# EAGLE board Qwiic_USB_Bridge_ATSAMD21G-Panel (EAGLE 9.6.2), part 1 of 2
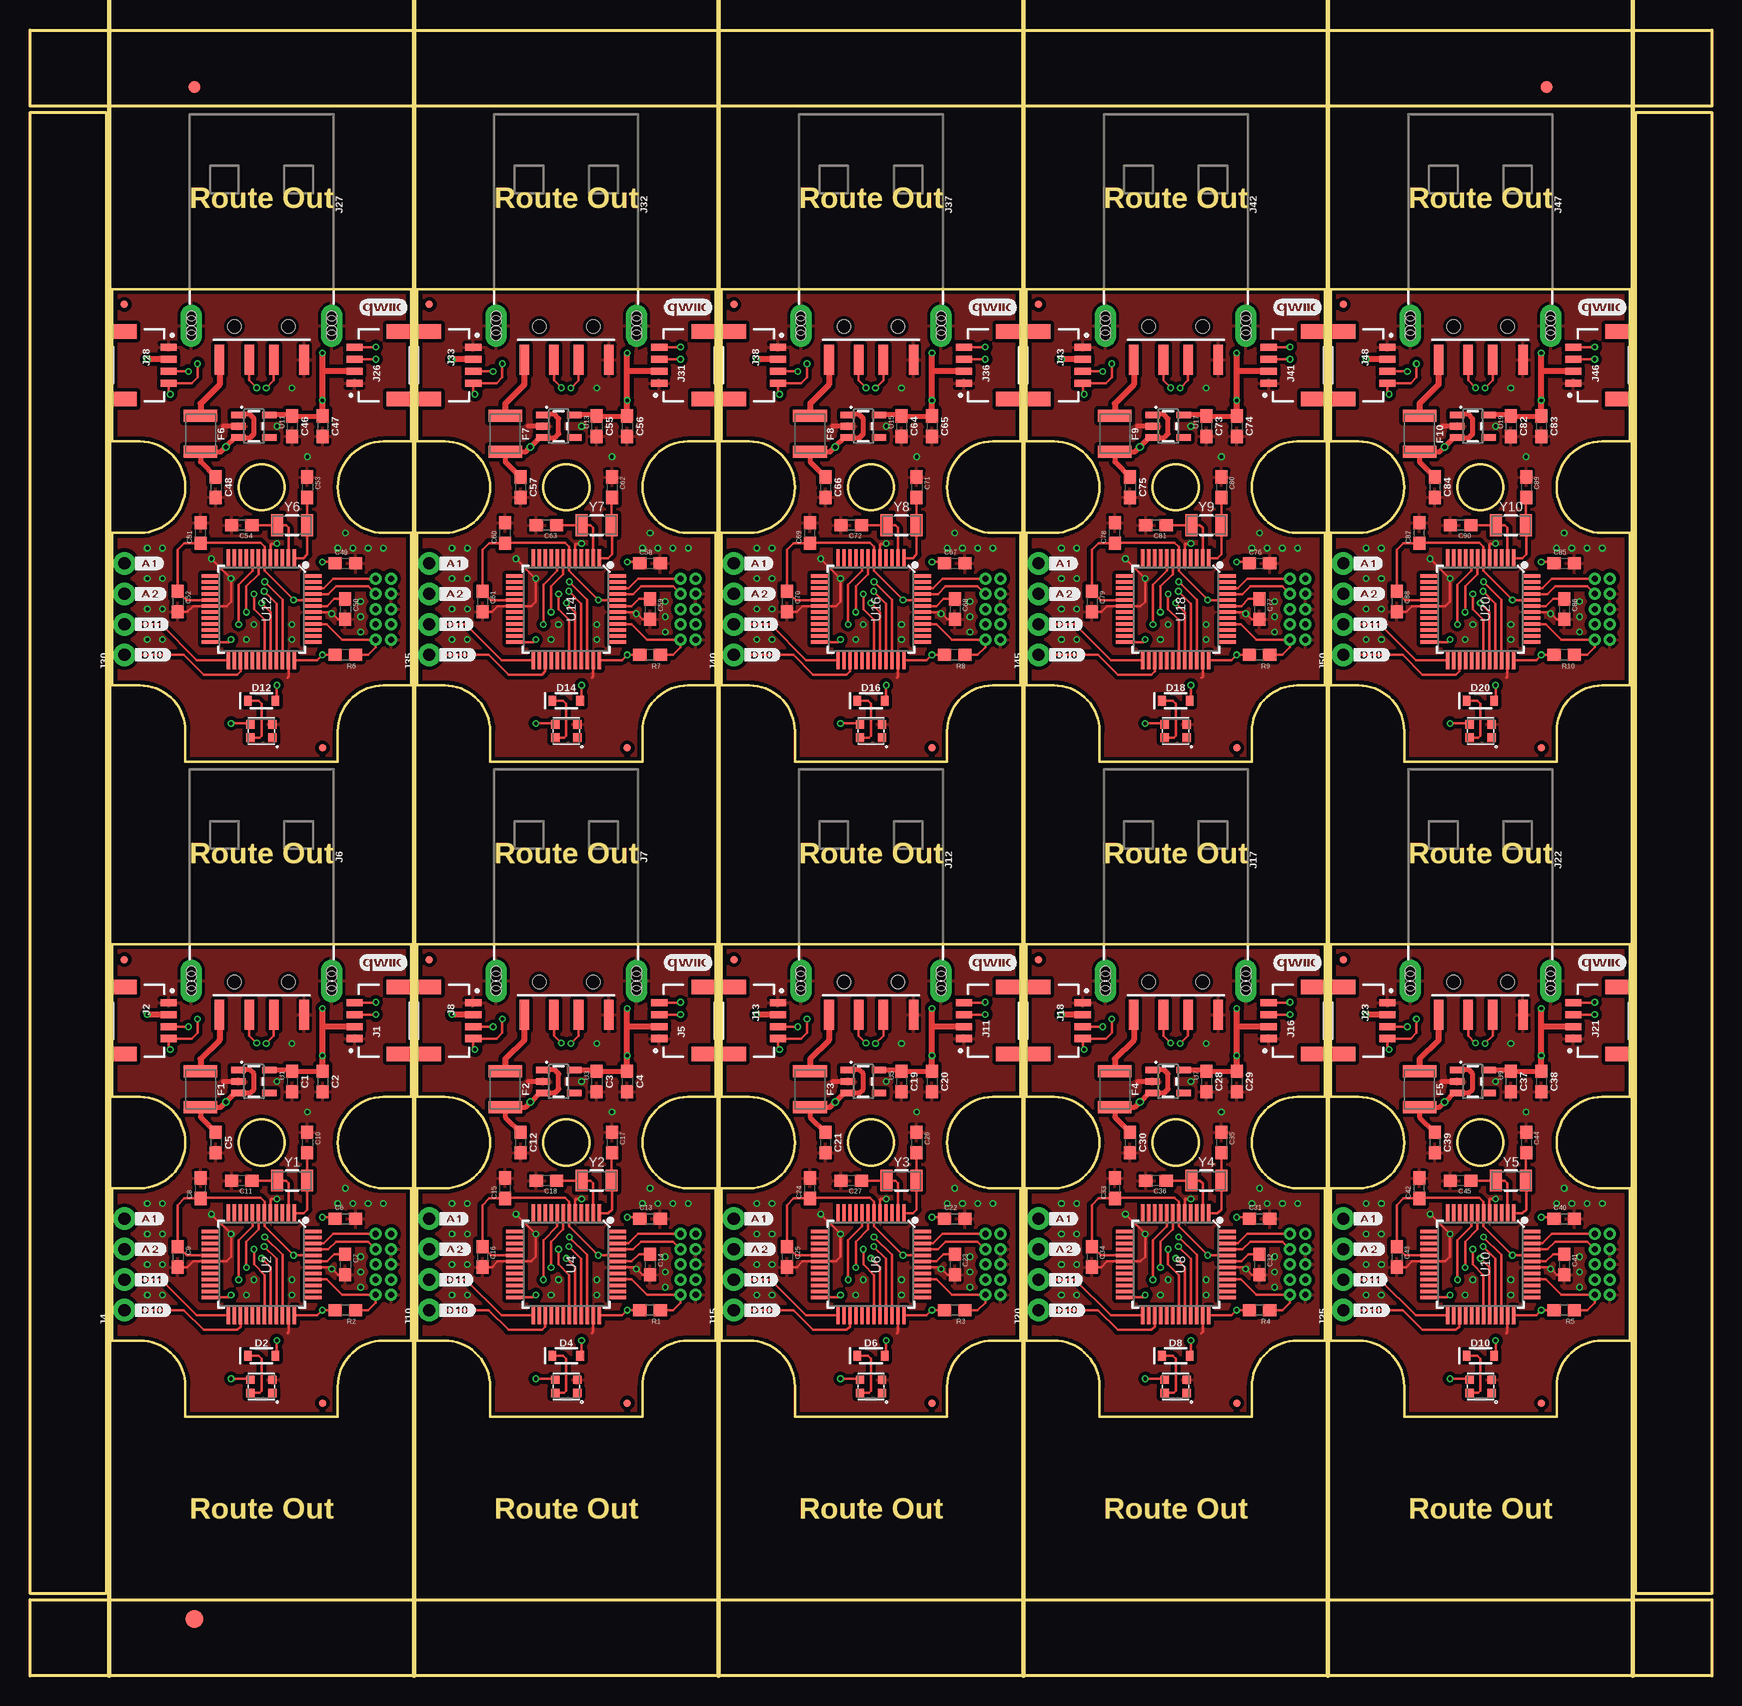
[diagram p0: board, top side]
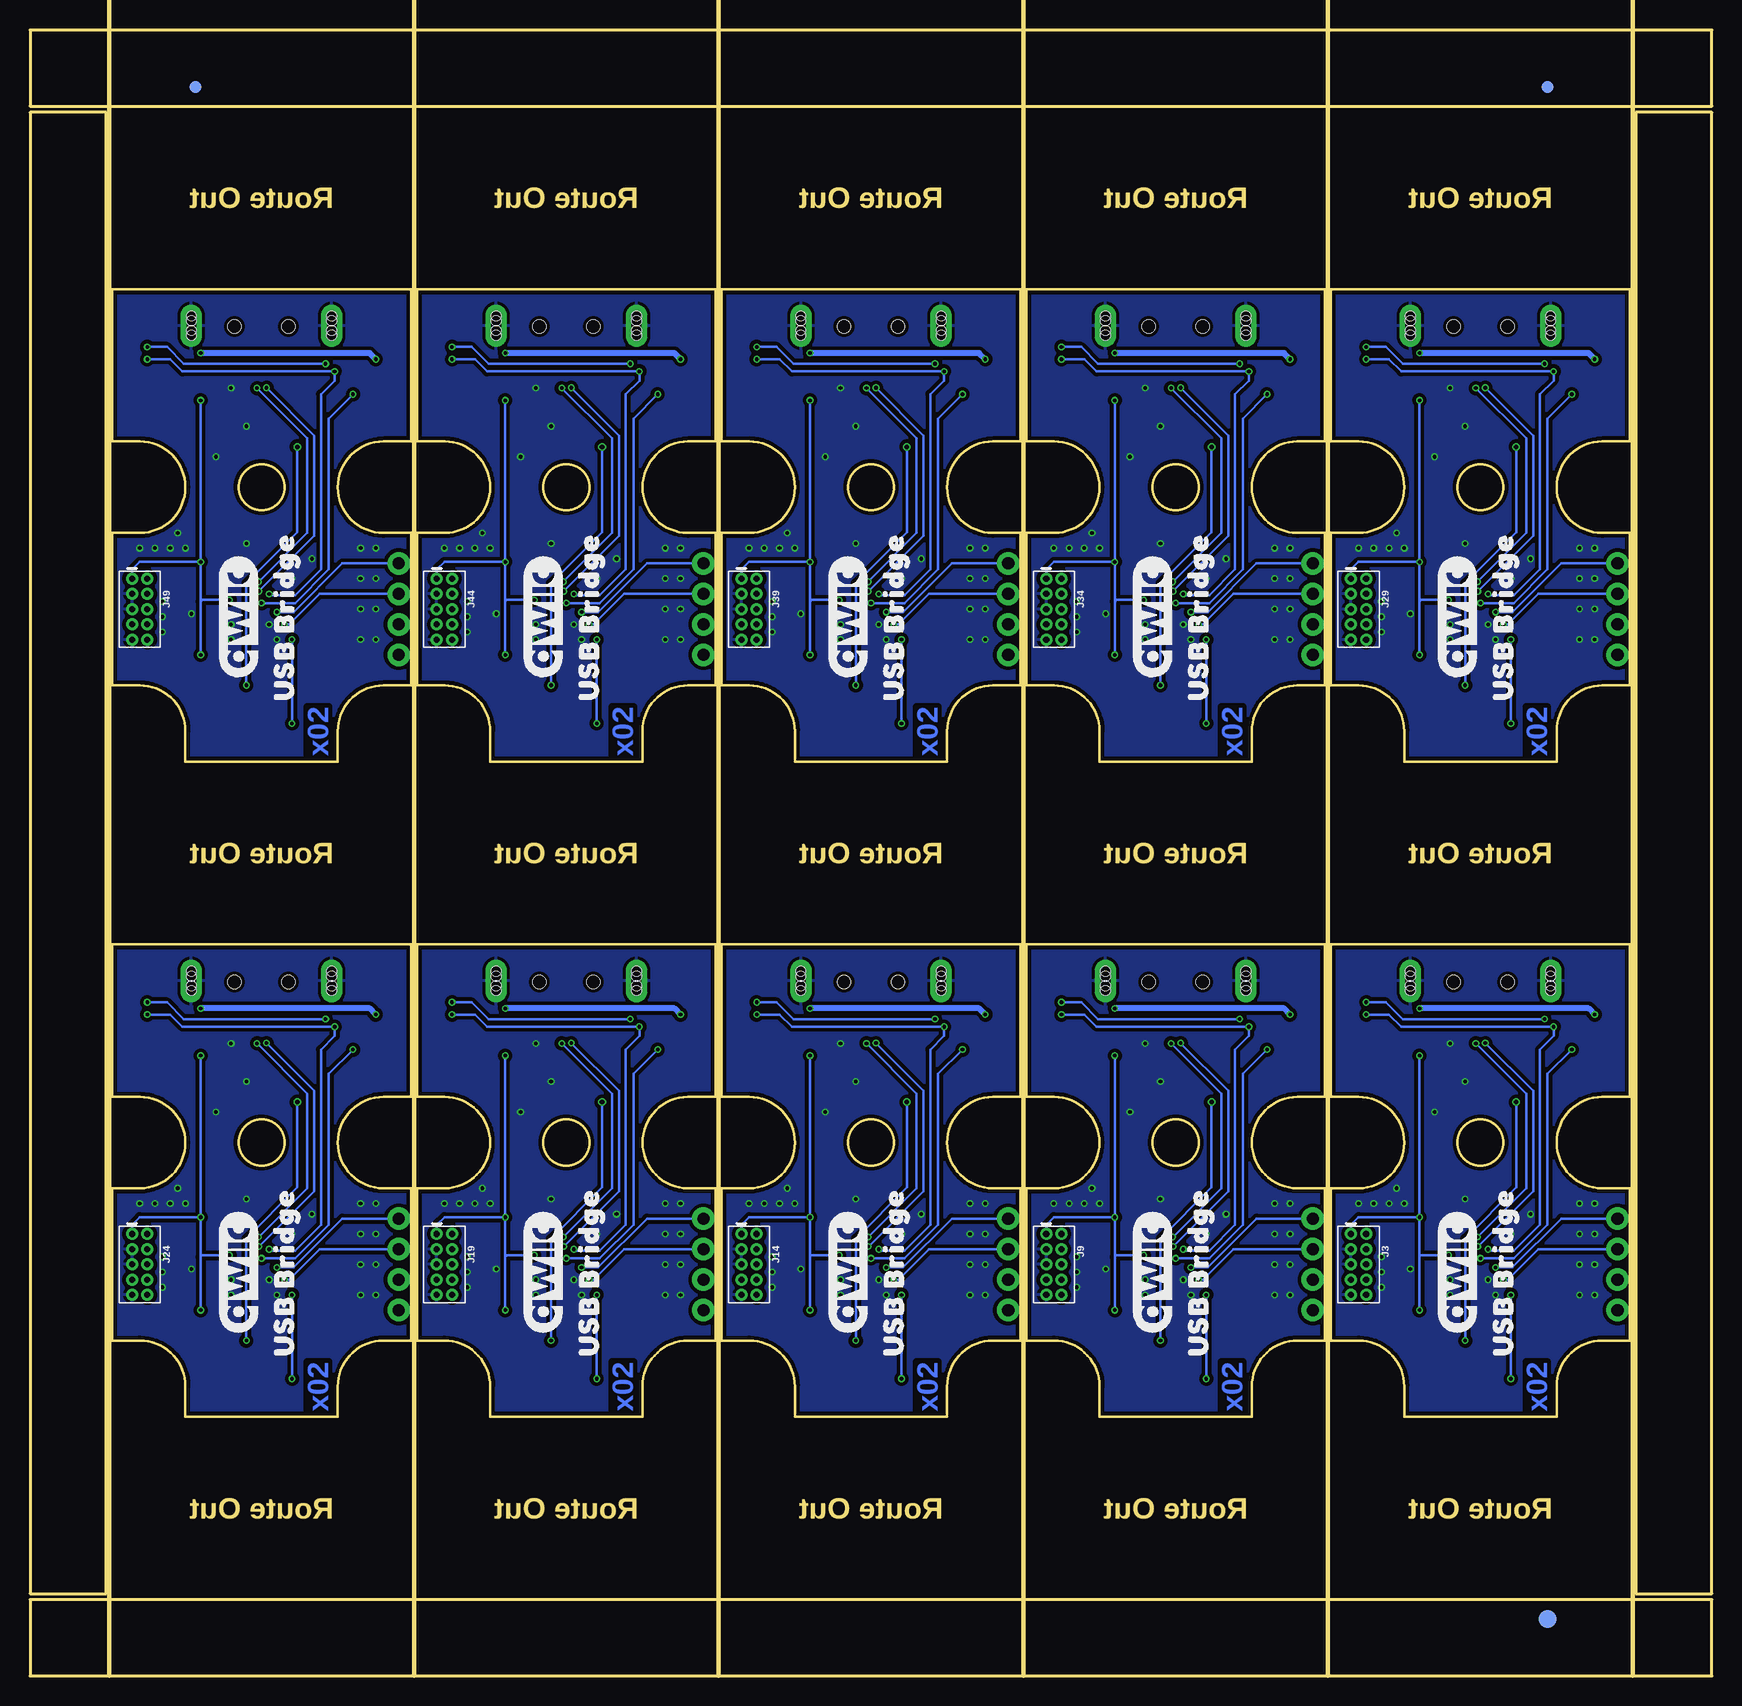
[diagram p1: board, bottom side, seen from below]

Size 140.21 x 137.16 mm. Coordinates in mm from the lower left corner, seen from the top.
Outline: 12.95,21.59 25.65,21.59 25.65,24.13 arc-90 29.46,27.94 31.75,27.94 31.75,40.64 29.46,40.64 arc-180 29.46,48.26 31.75,48.26 31.75,60.96 6.86,60.96 6.86,48.26 9.14,48.26 arc-180 9.14,40.64 6.86,40.64 6.86,27.94 9.14,27.94 arc-90 12.95,24.13 12.95,21.59
Outline: 38.35,21.59 51.05,21.59 51.05,24.13 arc-90 54.86,27.94 57.15,27.94 57.15,40.64 54.86,40.64 arc-180 54.86,48.26 57.15,48.26 57.15,60.96 32.26,60.96 32.26,48.26 34.54,48.26 arc-180 34.54,40.64 32.26,40.64 32.26,27.94 34.54,27.94 arc-90 38.35,24.13 38.35,21.59
Outline: 63.75,21.59 76.45,21.59 76.45,24.13 arc-90 80.26,27.94 82.55,27.94 82.55,40.64 80.26,40.64 arc-180 80.26,48.26 82.55,48.26 82.55,60.96 57.66,60.96 57.66,48.26 59.94,48.26 arc-180 59.94,40.64 57.66,40.64 57.66,27.94 59.94,27.94 arc-90 63.75,24.13 63.75,21.59
Outline: 89.15,21.59 101.85,21.59 101.85,24.13 arc-90 105.66,27.94 107.95,27.94 107.95,40.64 105.66,40.64 arc-180 105.66,48.26 107.95,48.26 107.95,60.96 83.06,60.96 83.06,48.26 85.34,48.26 arc-180 85.34,40.64 83.06,40.64 83.06,27.94 85.34,27.94 arc-90 89.15,24.13 89.15,21.59
Outline: 114.55,21.59 127.25,21.59 127.25,24.13 arc-90 131.06,27.94 133.35,27.94 133.35,40.64 131.06,40.64 arc-180 131.06,48.26 133.35,48.26 133.35,60.96 108.46,60.96 108.46,48.26 110.74,48.26 arc-180 110.74,40.64 108.46,40.64 108.46,27.94 110.74,27.94 arc-90 114.55,24.13 114.55,21.59
Outline: 12.95,76.2 25.65,76.2 25.65,78.74 arc-90 29.46,82.55 31.75,82.55 31.75,95.25 29.46,95.25 arc-180 29.46,102.87 31.75,102.87 31.75,115.57 6.86,115.57 6.86,102.87 9.14,102.87 arc-180 9.14,95.25 6.86,95.25 6.86,82.55 9.14,82.55 arc-90 12.95,78.74 12.95,76.2
Outline: 38.35,76.2 51.05,76.2 51.05,78.74 arc-90 54.86,82.55 57.15,82.55 57.15,95.25 54.86,95.25 arc-180 54.86,102.87 57.15,102.87 57.15,115.57 32.26,115.57 32.26,102.87 34.54,102.87 arc-180 34.54,95.25 32.26,95.25 32.26,82.55 34.54,82.55 arc-90 38.35,78.74 38.35,76.2
Outline: 63.75,76.2 76.45,76.2 76.45,78.74 arc-90 80.26,82.55 82.55,82.55 82.55,95.25 80.26,95.25 arc-180 80.26,102.87 82.55,102.87 82.55,115.57 57.66,115.57 57.66,102.87 59.94,102.87 arc-180 59.94,95.25 57.66,95.25 57.66,82.55 59.94,82.55 arc-90 63.75,78.74 63.75,76.2
Outline: 89.15,76.2 101.85,76.2 101.85,78.74 arc-90 105.66,82.55 107.95,82.55 107.95,95.25 105.66,95.25 arc-180 105.66,102.87 107.95,102.87 107.95,115.57 83.06,115.57 83.06,102.87 85.34,102.87 arc-180 85.34,95.25 83.06,95.25 83.06,82.55 85.34,82.55 arc-90 89.15,78.74 89.15,76.2
Outline: 114.55,76.2 127.25,76.2 127.25,78.74 arc-90 131.06,82.55 133.35,82.55 133.35,95.25 131.06,95.25 arc-180 131.06,102.87 133.35,102.87 133.35,115.57 108.46,115.57 108.46,102.87 110.74,102.87 arc-180 110.74,95.25 108.46,95.25 108.46,82.55 110.74,82.55 arc-90 114.55,78.74 114.55,76.2
Outline: 0,6.35 140.21,6.35 140.21,0 0,0 0,6.35
Outline: 133.86,130.3 140.21,130.3 140.21,6.86 133.86,6.86 133.86,130.3
Outline: 0,137.16 140.21,137.16 140.21,130.81 0,130.81 0,137.16
Outline: 0,130.3 6.35,130.3 6.35,6.86 0,6.86 0,130.3
Outline: circle at 19.3,44.45 radius 1.91
Outline: circle at 44.7,44.45 radius 1.91
Outline: circle at 70.1,44.45 radius 1.91
Outline: circle at 95.5,44.45 radius 1.91
Outline: circle at 120.9,44.45 radius 1.91
Outline: circle at 19.3,99.06 radius 1.91
Outline: circle at 44.7,99.06 radius 1.91
Outline: circle at 70.1,99.06 radius 1.91
Outline: circle at 95.5,99.06 radius 1.91
Outline: circle at 120.9,99.06 radius 1.91
Copper layers (1*16): Top 0.035mm / dielectric 1.5mm / Bottom 0.035mm
Design rules "Qwiic_USB_Bridge_ATSAMD21G": minimum track width 5mil, minimum drill 0.3mm, track to track 5mil, track to pad 5mil, pad to pad 5mil, via to via 5mil, smd to smd 5mil, copper to edge 7mil, drill to drill 7mil, minimum pad ring 5mil, minimum via ring 5mil, stop-mask expansion 4mil, vias tented up to drill 25mil, thermal gap 10mil
Milling: 6 lines

## Footprints (pad centres in the part's own frame; a part is rotated, then mirrored left to right if it is on the bottom)
0603 = smd 1.1 x 1: 1 -0.85,0; 2 0.85,0
WS2812-2020 = smd 0.7 x 0.7: DI -0.915,0.55; DO 0.915,-0.55; GND 0.915,0.55; VCC -0.915,-0.55
SOD-323 = smd 0.63 x 0.83: A 1.15,0; C -1.15,0
FIDUCIAL-1X2 = smd 1 x 1: 1 0,0
FIDUCIAL-1.5X3 = smd 1.5 x 1.5: 1 0,0
1210 = smd 1 x 2.8: 1 -1.5,0; 2 1.5,0
FIDUCIAL-MICRO = smd 0.635 x 0.635: 1 0,0
JST04_1MM_RA = smd 0.6 x 1.35: 1 -1.5,0; 2 -0.5,0; 3 0.5,0; 4 1.5,0 | smd 1.2 x 2: NC1 2.8,-3.675; NC2 -2.8,-3.675
2X5-PTH-1.27MM = drill 0.508 pad 1: 1 -2.54,-0.635; 2 -2.54,0.635; 3 -1.27,-0.635; 4 -1.27,0.635; 5 0,-0.635; 6 0,0.635; 7 1.27,-0.635; 8 1.27,0.635; 9 2.54,-0.635; 10 2.54,0.635
1X04_NO_SILK = drill 1.016 pad 1.88: 1 0,0; 2 2.54,0; 3 5.08,0; 4 7.62,0
USB-A-SMT-MALE = smd 2.5 x 0.8: D+1 10.95,1.027; D-1 10.95,-1.027; GND1 10.95,3.551; VBUS1 10.95,-3.5 | drill 0.8 pad 1.778 long: SHLD1 8.13,-5.85; SHLD2 8.13,5.85 | hole 1.1: 8.2,2.25; 8.2,-2.25 | hole 0.8: 8.53,-5.85; 8.93,-5.85; 7.73,-5.85; 7.33,-5.85; 8.53,5.85; 8.93,5.85; 7.73,5.85; 7.33,5.85
SOT23-5 = smd 0.55 x 1.2: 1 -0.95,-1.3; 2 0,-1.3; 3 0.95,-1.3; 4 0.95,1.3; 5 -0.95,1.3
TQFP-48 = smd 1.5 x 0.28: 1 -4.25,2.75; 2 -4.25,2.25; 3 -4.25,1.75; 4 -4.25,1.25; 5 -4.25,0.75; 6 -4.25,0.25; 7 -4.25,-0.25; 8 -4.25,-0.75; 9 -4.25,-1.25; 10 -4.25,-1.75; 11 -4.25,-2.25; 12 -4.25,-2.75; 25 4.25,-2.75; 26 4.25,-2.25; 27 4.25,-1.75; 28 4.25,-1.25; 29 4.25,-0.75; 30 4.25,-0.25; 31 4.25,0.25; 32 4.25,0.75; 33 4.25,1.25; 34 4.25,1.75; 35 4.25,2.25; 36 4.25,2.75 | smd 0.28 x 1.5: 13 -2.75,-4.25; 14 -2.25,-4.25; 15 -1.75,-4.25; 16 -1.25,-4.25; 17 -0.75,-4.25; 18 -0.25,-4.25; 19 0.25,-4.25; 20 0.75,-4.25; 21 1.25,-4.25; 22 1.75,-4.25; 23 2.25,-4.25; 24 2.75,-4.25; 37 2.75,4.25; 38 2.25,4.25; 39 1.75,4.25; 40 1.25,4.25; 41 0.75,4.25; 42 0.25,4.25; 43 -0.25,4.25; 44 -0.75,4.25; 45 -1.25,4.25; 46 -1.75,4.25; 47 -2.25,4.25; 48 -2.75,4.25
CRYSTAL-SMD-3.2X1.5MM = smd 1 x 1.8: P$1 -1.25,0; P$2 1.25,0

## Placement (x,y rotation side)
C1  10uF  [0603]  21.84,49.53 270 top
C2  1.0uF  [0603]  24.38,49.53 270 top
C3  10uF  [0603]  47.24,49.53 270 top
C4  1.0uF  [0603]  49.78,49.53 270 top
C5  0.1uF  [0603]  15.49,44.45 270 top
C6  0.1uF  [0603]  26.29,38.1 0 top
C7  0.1uF  [0603]  26.29,34.29 270 top
C8  0.1uF  [0603]  14.22,40.64 90 top
C9  0.1uF  [0603]  12.32,34.92 270 top
C10  15pF  [0603]  23.11,44.45 270 top
C11  15pF  [0603]  17.65,41.27 180 top
C12  0.1uF  [0603]  40.89,44.45 270 top
C13  0.1uF  [0603]  51.69,38.1 0 top
C14  0.1uF  [0603]  51.69,34.29 270 top
C15  0.1uF  [0603]  39.62,40.64 90 top
C16  0.1uF  [0603]  37.72,34.92 270 top
C17  15pF  [0603]  48.51,44.45 270 top
C18  15pF  [0603]  43.05,41.27 180 top
C19  10uF  [0603]  72.64,49.53 270 top
C20  1.0uF  [0603]  75.18,49.53 270 top
C21  0.1uF  [0603]  66.29,44.45 270 top
C22  0.1uF  [0603]  77.09,38.1 0 top
C23  0.1uF  [0603]  77.09,34.29 270 top
C24  0.1uF  [0603]  65.02,40.64 90 top
C25  0.1uF  [0603]  63.12,34.92 270 top
C26  15pF  [0603]  73.91,44.45 270 top
C27  15pF  [0603]  68.45,41.27 180 top
C28  10uF  [0603]  98.04,49.53 270 top
C29  1.0uF  [0603]  100.58,49.53 270 top
C30  0.1uF  [0603]  91.69,44.45 270 top
C31  0.1uF  [0603]  102.49,38.1 0 top
C32  0.1uF  [0603]  102.49,34.29 270 top
C33  0.1uF  [0603]  90.42,40.64 90 top
C34  0.1uF  [0603]  88.52,34.92 270 top
C35  15pF  [0603]  99.31,44.45 270 top
C36  15pF  [0603]  93.85,41.27 180 top
C37  10uF  [0603]  123.44,49.53 270 top
C38  1.0uF  [0603]  125.98,49.53 270 top
C39  0.1uF  [0603]  117.09,44.45 270 top
C40  0.1uF  [0603]  127.89,38.1 0 top
C41  0.1uF  [0603]  127.89,34.29 270 top
C42  0.1uF  [0603]  115.82,40.64 90 top
C43  0.1uF  [0603]  113.92,34.92 270 top
C44  15pF  [0603]  124.71,44.45 270 top
C45  15pF  [0603]  119.25,41.27 180 top
C46  10uF  [0603]  21.84,104.14 270 top
C47  1.0uF  [0603]  24.38,104.14 270 top
C48  0.1uF  [0603]  15.49,99.06 270 top
C49  0.1uF  [0603]  26.29,92.71 0 top
C50  0.1uF  [0603]  26.29,88.9 270 top
C51  0.1uF  [0603]  14.22,95.25 90 top
C52  0.1uF  [0603]  12.32,89.53 270 top
C53  15pF  [0603]  23.11,99.06 270 top
C54  15pF  [0603]  17.65,95.89 180 top
C55  10uF  [0603]  47.24,104.14 270 top
C56  1.0uF  [0603]  49.78,104.14 270 top
C57  0.1uF  [0603]  40.89,99.06 270 top
C58  0.1uF  [0603]  51.69,92.71 0 top
C59  0.1uF  [0603]  51.69,88.9 270 top
C60  0.1uF  [0603]  39.62,95.25 90 top
C61  0.1uF  [0603]  37.72,89.53 270 top
C62  15pF  [0603]  48.51,99.06 270 top
C63  15pF  [0603]  43.05,95.89 180 top
C64  10uF  [0603]  72.64,104.14 270 top
C65  1.0uF  [0603]  75.18,104.14 270 top
C66  0.1uF  [0603]  66.29,99.06 270 top
C67  0.1uF  [0603]  77.09,92.71 0 top
C68  0.1uF  [0603]  77.09,88.9 270 top
C69  0.1uF  [0603]  65.02,95.25 90 top
C70  0.1uF  [0603]  63.12,89.53 270 top
C71  15pF  [0603]  73.91,99.06 270 top
C72  15pF  [0603]  68.45,95.89 180 top
C73  10uF  [0603]  98.04,104.14 270 top
C74  1.0uF  [0603]  100.58,104.14 270 top
C75  0.1uF  [0603]  91.69,99.06 270 top
C76  0.1uF  [0603]  102.49,92.71 0 top
C77  0.1uF  [0603]  102.49,88.9 270 top
C78  0.1uF  [0603]  90.42,95.25 90 top
C79  0.1uF  [0603]  88.52,89.53 270 top
C80  15pF  [0603]  99.31,99.06 270 top
C81  15pF  [0603]  93.85,95.89 180 top
C82  10uF  [0603]  123.44,104.14 270 top
C83  1.0uF  [0603]  125.98,104.14 270 top
C84  0.1uF  [0603]  117.09,99.06 270 top
C85  0.1uF  [0603]  127.89,92.71 0 top
C86  0.1uF  [0603]  127.89,88.9 270 top
C87  0.1uF  [0603]  115.82,95.25 90 top
C88  0.1uF  [0603]  113.92,89.53 270 top
C89  15pF  [0603]  124.71,99.06 270 top
C90  15pF  [0603]  119.25,95.89 180 top
D1  WS2812_2020  [WS2812-2020]  19.3,24.13 0 top
D2  250mA/100V  [SOD-323]  19.3,26.67 0 top
D3  WS2812_2020  [WS2812-2020]  44.7,24.13 0 top
D4  250mA/100V  [SOD-323]  44.7,26.67 0 top
D5  WS2812_2020  [WS2812-2020]  70.1,24.13 0 top
D6  250mA/100V  [SOD-323]  70.1,26.67 0 top
D7  WS2812_2020  [WS2812-2020]  95.5,24.13 0 top
D8  250mA/100V  [SOD-323]  95.5,26.67 0 top
D9  WS2812_2020  [WS2812-2020]  120.9,24.13 0 top
D10  250mA/100V  [SOD-323]  120.9,26.67 0 top
D11  WS2812_2020  [WS2812-2020]  19.3,78.74 0 top
D12  250mA/100V  [SOD-323]  19.3,81.28 0 top
D13  WS2812_2020  [WS2812-2020]  44.7,78.74 0 top
D14  250mA/100V  [SOD-323]  44.7,81.28 0 top
D15  WS2812_2020  [WS2812-2020]  70.1,78.74 0 top
D16  250mA/100V  [SOD-323]  70.1,81.28 0 top
D17  WS2812_2020  [WS2812-2020]  95.5,78.74 0 top
D18  250mA/100V  [SOD-323]  95.5,81.28 0 top
D19  WS2812_2020  [WS2812-2020]  120.9,78.74 0 top
D20  250mA/100V  [SOD-323]  120.9,81.28 0 top
E$1  [FIDUCIAL-1X2]  13.72,132.4 0 top
E$2  [FIDUCIAL-1X2]  13.72,132.4 0 bottom
E$3  [FIDUCIAL-1X2]  126.43,132.4 0 top
E$4  [FIDUCIAL-1X2]  126.43,132.4 0 bottom
E$5  [FIDUCIAL-1.5X3]  13.72,4.76 0 top
E$6  [FIDUCIAL-1.5X3]  13.72,4.76 0 bottom
F1  6V/2A  [1210]  14.22,48.89 270 top
F2  6V/2A  [1210]  39.62,48.89 270 top
F3  6V/2A  [1210]  65.02,48.89 270 top
F4  6V/2A  [1210]  90.42,48.89 270 top
F5  6V/2A  [1210]  115.82,48.89 270 top
F6  6V/2A  [1210]  14.22,103.51 270 top
F7  6V/2A  [1210]  39.62,103.51 270 top
F8  6V/2A  [1210]  65.02,103.51 270 top
F9  6V/2A  [1210]  90.42,103.51 270 top
F10  6V/2A  [1210]  115.82,103.51 270 top
FD1  FIDUCIALUFIDUCIAL  [FIDUCIAL-MICRO]  7.87,59.69 0 top
FD2  FIDUCIALUFIDUCIAL  [FIDUCIAL-MICRO]  24.38,22.73 0 top
FD3  FIDUCIALUFIDUCIAL  [FIDUCIAL-MICRO]  33.27,59.69 0 top
FD4  FIDUCIALUFIDUCIAL  [FIDUCIAL-MICRO]  49.78,22.73 0 top
FD5  FIDUCIALUFIDUCIAL  [FIDUCIAL-MICRO]  58.67,59.69 0 top
FD6  FIDUCIALUFIDUCIAL  [FIDUCIAL-MICRO]  75.18,22.73 0 top
FD7  FIDUCIALUFIDUCIAL  [FIDUCIAL-MICRO]  84.07,59.69 0 top
FD8  FIDUCIALUFIDUCIAL  [FIDUCIAL-MICRO]  100.58,22.73 0 top
FD9  FIDUCIALUFIDUCIAL  [FIDUCIAL-MICRO]  109.47,59.69 0 top
FD10  FIDUCIALUFIDUCIAL  [FIDUCIAL-MICRO]  125.98,22.73 0 top
FD11  FIDUCIALUFIDUCIAL  [FIDUCIAL-MICRO]  7.87,114.3 0 top
FD12  FIDUCIALUFIDUCIAL  [FIDUCIAL-MICRO]  24.38,77.34 0 top
FD13  FIDUCIALUFIDUCIAL  [FIDUCIAL-MICRO]  33.27,114.3 0 top
FD14  FIDUCIALUFIDUCIAL  [FIDUCIAL-MICRO]  49.78,77.34 0 top
FD15  FIDUCIALUFIDUCIAL  [FIDUCIAL-MICRO]  58.67,114.3 0 top
FD16  FIDUCIALUFIDUCIAL  [FIDUCIAL-MICRO]  75.18,77.34 0 top
FD17  FIDUCIALUFIDUCIAL  [FIDUCIAL-MICRO]  84.07,114.3 0 top
FD18  FIDUCIALUFIDUCIAL  [FIDUCIAL-MICRO]  100.58,77.34 0 top
FD19  FIDUCIALUFIDUCIAL  [FIDUCIAL-MICRO]  109.47,114.3 0 top
FD20  FIDUCIALUFIDUCIAL  [FIDUCIAL-MICRO]  125.98,77.34 0 top
J1  QWIIC_RIGHT_ANGLE  [JST04_1MM_RA]  27.05,54.61 90 top
J2  QWIIC_RIGHT_ANGLE  [JST04_1MM_RA]  11.56,54.61 270 top
J3  CORTEX_JTAG_DEBUG_MINIMUM_PTH  [2X5-PTH-1.27MM]  29.46,34.29 270 bottom
J4  [1X04_NO_SILK]  7.87,30.48 90 top
J5  QWIIC_RIGHT_ANGLE  [JST04_1MM_RA]  52.45,54.61 90 top
J6  USB_A_SMT_MALE  [USB-A-SMT-MALE]  19.3,66.04 270 top
J7  USB_A_SMT_MALE  [USB-A-SMT-MALE]  44.7,66.04 270 top
J8  QWIIC_RIGHT_ANGLE  [JST04_1MM_RA]  36.96,54.61 270 top
J9  CORTEX_JTAG_DEBUG_MINIMUM_PTH  [2X5-PTH-1.27MM]  54.86,34.29 270 bottom
J10  [1X04_NO_SILK]  33.27,30.48 90 top
J11  QWIIC_RIGHT_ANGLE  [JST04_1MM_RA]  77.85,54.61 90 top
J12  USB_A_SMT_MALE  [USB-A-SMT-MALE]  70.1,66.04 270 top
J13  QWIIC_RIGHT_ANGLE  [JST04_1MM_RA]  62.36,54.61 270 top
J14  CORTEX_JTAG_DEBUG_MINIMUM_PTH  [2X5-PTH-1.27MM]  80.26,34.29 270 bottom
J15  [1X04_NO_SILK]  58.67,30.48 90 top
J16  QWIIC_RIGHT_ANGLE  [JST04_1MM_RA]  103.25,54.61 90 top
J17  USB_A_SMT_MALE  [USB-A-SMT-MALE]  95.5,66.04 270 top
J18  QWIIC_RIGHT_ANGLE  [JST04_1MM_RA]  87.76,54.61 270 top
J19  CORTEX_JTAG_DEBUG_MINIMUM_PTH  [2X5-PTH-1.27MM]  105.66,34.29 270 bottom
J20  [1X04_NO_SILK]  84.07,30.48 90 top
J21  QWIIC_RIGHT_ANGLE  [JST04_1MM_RA]  128.65,54.61 90 top
J22  USB_A_SMT_MALE  [USB-A-SMT-MALE]  120.9,66.04 270 top
J23  QWIIC_RIGHT_ANGLE  [JST04_1MM_RA]  113.16,54.61 270 top
J24  CORTEX_JTAG_DEBUG_MINIMUM_PTH  [2X5-PTH-1.27MM]  131.06,34.29 270 bottom
J25  [1X04_NO_SILK]  109.47,30.48 90 top
J26  QWIIC_RIGHT_ANGLE  [JST04_1MM_RA]  27.05,109.22 90 top
J27  USB_A_SMT_MALE  [USB-A-SMT-MALE]  19.3,120.65 270 top
J28  QWIIC_RIGHT_ANGLE  [JST04_1MM_RA]  11.56,109.22 270 top
J29  CORTEX_JTAG_DEBUG_MINIMUM_PTH  [2X5-PTH-1.27MM]  29.46,88.9 270 bottom
J30  [1X04_NO_SILK]  7.87,85.09 90 top
J31  QWIIC_RIGHT_ANGLE  [JST04_1MM_RA]  52.45,109.22 90 top
J32  USB_A_SMT_MALE  [USB-A-SMT-MALE]  44.7,120.65 270 top
J33  QWIIC_RIGHT_ANGLE  [JST04_1MM_RA]  36.96,109.22 270 top
J34  CORTEX_JTAG_DEBUG_MINIMUM_PTH  [2X5-PTH-1.27MM]  54.86,88.9 270 bottom
J35  [1X04_NO_SILK]  33.27,85.09 90 top
J36  QWIIC_RIGHT_ANGLE  [JST04_1MM_RA]  77.85,109.22 90 top
J37  USB_A_SMT_MALE  [USB-A-SMT-MALE]  70.1,120.65 270 top
J38  QWIIC_RIGHT_ANGLE  [JST04_1MM_RA]  62.36,109.22 270 top
J39  CORTEX_JTAG_DEBUG_MINIMUM_PTH  [2X5-PTH-1.27MM]  80.26,88.9 270 bottom
J40  [1X04_NO_SILK]  58.67,85.09 90 top
J41  QWIIC_RIGHT_ANGLE  [JST04_1MM_RA]  103.25,109.22 90 top
J42  USB_A_SMT_MALE  [USB-A-SMT-MALE]  95.5,120.65 270 top
J43  QWIIC_RIGHT_ANGLE  [JST04_1MM_RA]  87.76,109.22 270 top
J44  CORTEX_JTAG_DEBUG_MINIMUM_PTH  [2X5-PTH-1.27MM]  105.66,88.9 270 bottom
J45  [1X04_NO_SILK]  84.07,85.09 90 top
J46  QWIIC_RIGHT_ANGLE  [JST04_1MM_RA]  128.65,109.22 90 top
J47  USB_A_SMT_MALE  [USB-A-SMT-MALE]  120.9,120.65 270 top
J48  QWIIC_RIGHT_ANGLE  [JST04_1MM_RA]  113.16,109.22 270 top
J49  CORTEX_JTAG_DEBUG_MINIMUM_PTH  [2X5-PTH-1.27MM]  131.06,88.9 270 bottom
J50  [1X04_NO_SILK]  109.47,85.09 90 top
R1  10k  [0603]  51.69,30.48 180 top
R2  10k  [0603]  26.29,30.48 180 top
R3  10k  [0603]  77.09,30.48 180 top
R4  10k  [0603]  102.49,30.48 180 top
R5  10k  [0603]  127.89,30.48 180 top
R6  10k  [0603]  26.29,85.09 180 top
R7  10k  [0603]  51.69,85.09 180 top
R8  10k  [0603]  77.09,85.09 180 top
R9  10k  [0603]  102.49,85.09 180 top
R10  10k  [0603]  127.89,85.09 180 top
U1  3.3V  [SOT23-5]  18.67,49.53 270 top
U2  ATSAMD21G-A  [TQFP-48]  19.3,34.29 270 top
U3  3.3V  [SOT23-5]  44.07,49.53 270 top
U4  ATSAMD21G-A  [TQFP-48]  44.7,34.29 270 top
U5  3.3V  [SOT23-5]  69.47,49.53 270 top
U6  ATSAMD21G-A  [TQFP-48]  70.1,34.29 270 top
U7  3.3V  [SOT23-5]  94.87,49.53 270 top
U8  ATSAMD21G-A  [TQFP-48]  95.5,34.29 270 top
U9  3.3V  [SOT23-5]  120.27,49.53 270 top
U10  ATSAMD21G-A  [TQFP-48]  120.9,34.29 270 top
U11  3.3V  [SOT23-5]  18.67,104.14 270 top
U12  ATSAMD21G-A  [TQFP-48]  19.3,88.9 270 top
U13  3.3V  [SOT23-5]  44.07,104.14 270 top
U14  ATSAMD21G-A  [TQFP-48]  44.7,88.9 270 top
U15  3.3V  [SOT23-5]  69.47,104.14 270 top
U16  ATSAMD21G-A  [TQFP-48]  70.1,88.9 270 top
U17  3.3V  [SOT23-5]  94.87,104.14 270 top
U18  ATSAMD21G-A  [TQFP-48]  95.5,88.9 270 top
U19  3.3V  [SOT23-5]  120.27,104.14 270 top
U20  ATSAMD21G-A  [TQFP-48]  120.9,88.9 270 top
U$1  [#_A1#0]  8.51,38.1 0 top
U$2  [#_A2#0]  8.51,35.56 0 top
U$3  [#_D11#0]  8.51,33.02 0 top
U$4  [#_D10#0]  8.51,30.48 0 top
U$5  [QWIIC_10MM]  46.61,33.66 90 bottom
U$6  [USB_BRIDGE0]  42.8,33.66 90 bottom
U$7  [QWIIC_10MM]  21.21,33.66 90 bottom
U$8  [USB_BRIDGE0]  17.4,33.66 90 bottom
U$9  [QWIIC_4MM]  29.46,59.44 0 top
U$10  [QWIIC_4MM]  54.86,59.44 0 top
U$11  [#_A1#0]  33.91,38.1 0 top
U$12  [#_A2#0]  33.91,35.56 0 top
U$13  [#_D11#0]  33.91,33.02 0 top
U$14  [#_D10#0]  33.91,30.48 0 top
U$15  [QWIIC_10MM]  72.01,33.66 90 bottom
U$16  [USB_BRIDGE0]  68.2,33.66 90 bottom
U$17  [QWIIC_4MM]  80.26,59.44 0 top
U$18  [#_A1#0]  59.31,38.1 0 top
U$19  [#_A2#0]  59.31,35.56 0 top
U$20  [#_D11#0]  59.31,33.02 0 top
U$21  [#_D10#0]  59.31,30.48 0 top
U$22  [QWIIC_10MM]  97.41,33.66 90 bottom
U$23  [USB_BRIDGE0]  93.6,33.66 90 bottom
U$24  [QWIIC_4MM]  105.66,59.44 0 top
U$25  [#_A1#0]  84.71,38.1 0 top
U$26  [#_A2#0]  84.71,35.56 0 top
U$27  [#_D11#0]  84.71,33.02 0 top
U$28  [#_D10#0]  84.71,30.48 0 top
U$29  [QWIIC_10MM]  122.81,33.66 90 bottom
U$30  [USB_BRIDGE0]  119,33.66 90 bottom
U$31  [QWIIC_4MM]  131.06,59.44 0 top
U$32  [#_A1#0]  110.11,38.1 0 top
U$33  [#_A2#0]  110.11,35.56 0 top
U$34  [#_D11#0]  110.11,33.02 0 top
U$35  [#_D10#0]  110.11,30.48 0 top
U$36  [QWIIC_10MM]  21.21,88.27 90 bottom
U$37  [USB_BRIDGE0]  17.4,88.27 90 bottom
U$38  [QWIIC_4MM]  29.46,114.05 0 top
U$39  [#_A1#0]  8.51,92.71 0 top
U$40  [#_A2#0]  8.51,90.17 0 top
U$41  [#_D11#0]  8.51,87.63 0 top
U$42  [#_D10#0]  8.51,85.09 0 top
U$43  [QWIIC_10MM]  46.61,88.27 90 bottom
U$44  [USB_BRIDGE0]  42.8,88.27 90 bottom
U$45  [QWIIC_4MM]  54.86,114.05 0 top
U$46  [#_A1#0]  33.91,92.71 0 top
U$47  [#_A2#0]  33.91,90.17 0 top
U$48  [#_D11#0]  33.91,87.63 0 top
U$49  [#_D10#0]  33.91,85.09 0 top
U$50  [QWIIC_10MM]  72.01,88.27 90 bottom
U$51  [USB_BRIDGE0]  68.2,88.27 90 bottom
U$52  [QWIIC_4MM]  80.26,114.05 0 top
U$53  [#_A1#0]  59.31,92.71 0 top
U$54  [#_A2#0]  59.31,90.17 0 top
U$55  [#_D11#0]  59.31,87.63 0 top
U$56  [#_D10#0]  59.31,85.09 0 top
U$57  [QWIIC_10MM]  97.41,88.27 90 bottom
U$58  [USB_BRIDGE0]  93.6,88.27 90 bottom
U$59  [QWIIC_4MM]  105.66,114.05 0 top
U$60  [#_A1#0]  84.71,92.71 0 top
U$61  [#_A2#0]  84.71,90.17 0 top
U$62  [#_D11#0]  84.71,87.63 0 top
U$63  [#_D10#0]  84.71,85.09 0 top
U$64  [QWIIC_10MM]  122.81,88.27 90 bottom
U$65  [USB_BRIDGE0]  119,88.27 90 bottom
U$66  [QWIIC_4MM]  131.06,114.05 0 top
U$67  [#_A1#0]  110.11,92.71 0 top
U$68  [#_A2#0]  110.11,90.17 0 top
U$69  [#_D11#0]  110.11,87.63 0 top
U$70  [#_D10#0]  110.11,85.09 0 top
Y1  32.768kHz  [CRYSTAL-SMD-3.2X1.5MM]  21.84,41.27 0 top
Y2  32.768kHz  [CRYSTAL-SMD-3.2X1.5MM]  47.24,41.27 0 top
Y3  32.768kHz  [CRYSTAL-SMD-3.2X1.5MM]  72.64,41.27 0 top
Y4  32.768kHz  [CRYSTAL-SMD-3.2X1.5MM]  98.04,41.27 0 top
Y5  32.768kHz  [CRYSTAL-SMD-3.2X1.5MM]  123.44,41.27 0 top
Y6  32.768kHz  [CRYSTAL-SMD-3.2X1.5MM]  21.84,95.89 0 top
Y7  32.768kHz  [CRYSTAL-SMD-3.2X1.5MM]  47.24,95.89 0 top
Y8  32.768kHz  [CRYSTAL-SMD-3.2X1.5MM]  72.64,95.89 0 top
Y9  32.768kHz  [CRYSTAL-SMD-3.2X1.5MM]  98.04,95.89 0 top
Y10  32.768kHz  [CRYSTAL-SMD-3.2X1.5MM]  123.44,95.89 0 top

## Library data of the parts
C1 C3 C19 C28 C37 C46 C55 C64 C73 C82 = SparkFun-Capacitors; PROD_ID: CAP-11015
C2 C4 C20 C29 C38 C47 C56 C65 C74 C83 = SparkFun-Capacitors; PROD_ID: CAP-00868
C5-C9 C12-C16 C21-C25 C30-C34 C39-C43 C48-C52 C57-C61 C66-C70 C75-C79 C84-C88 = SparkFun-Capacitors; PROD_ID: CAP-00810
C10 C11 C17 C18 C26 C27 C35 C36 C44 C45 C53 C54 C62 C63 C71 C72 C80 C81 C89 C90 = SparkFun-Capacitors; PROD_ID: CAP-07881
D1 D3 D5 D7 D9 D11 D13 D15 D17 D19 = SparkFun-LED; PROD_ID: DIO-15591
D2 D4 D6 D8 D10 D12 D14 D16 D18 D20 = SparkFun-DiscreteSemi; PROD_ID: DIO-09646
E$1-E$4 FD1-FD20 U$5 U$7 U$9 U$10 U$15 U$17 U$22 U$24 U$29 U$31 U$36 U$38 U$43 U$45 U$50 U$52 U$57 U$59 U$64 U$66 = SparkFun-Aesthetics
E$5 E$6 = SparkFun-Retired
F1-F10 = SparkFun-Fuses; PROD_ID: RES-14313
J1 J2 J5 J8 J11 J13 J16 J18 J21 J23 J26 J28 J31 J33 J36 J38 J41 J43 J46 J48 = SparkFun-Connectors; PROD_ID: CONN-13694
J3 J9 J14 J19 J24 J29 J34 J39 J44 J49 = SparkFun-Connectors
J4 J10 J15 J20 J25 J30 J35 J40 J45 J50 = SparkFun-Connectors; PROD_ID: CONN-09696
J6 J7 J12 J17 J22 J27 J32 J37 J42 J47 = SparkFun-Connectors; PROD_ID: CONN-11499
R1-R10 = SparkFun-Resistors; PROD_ID: RES-00824
U1 U3 U5 U7 U9 U11 U13 U15 U17 U19 = SparkFun-IC-Power; PROD_ID: VREG-12457
U2 U4 U6 U8 U10 U12 U14 U16 U18 U20 = SparkFun-IC-Microcontroller; PROD_ID: IC-13064
U$1-U$4 U$6 U$8 U$11-U$14 U$16 U$18-U$21 U$23 U$25-U$28 U$30 U$32-U$35 U$37 U$39-U$42 U$44 U$46-U$49 U$51 U$53-U$56 U$58 U$60-U$63 U$65 U$67-U$70 = output
Y1-Y10 = SparkFun-Clocks; PROD_ID: XTAL-13062

## Nets
3.3V: C1.1 C2.1 C6.1 C8.1 C9.1 J1.2 J2.2 J3.1 R2.2 U1.5 U2.6 U2.17 U2.36 U2.44
3.3V1: C3.1 C4.1 C13.1 C15.1 C16.1 J5.2 J8.2 J9.1 R1.2 U3.5 U4.6 U4.17 U4.36 U4.44
3.3V2: C19.1 C20.1 C22.1 C24.1 C25.1 J11.2 J13.2 J14.1 R3.2 U5.5 U6.6 U6.17 U6.36 U6.44
3.3V3: C28.1 C29.1 C31.1 C33.1 C34.1 J16.2 J18.2 J19.1 R4.2 U7.5 U8.6 U8.17 U8.36 U8.44
3.3V4: C37.1 C38.1 C40.1 C42.1 C43.1 J21.2 J23.2 J24.1 R5.2 U9.5 U10.6 U10.17 U10.36 U10.44
3.3V5: C46.1 C47.1 C49.1 C51.1 C52.1 J26.2 J28.2 J29.1 R6.2 U11.5 U12.6 U12.17 U12.36 U12.44
3.3V6: C55.1 C56.1 C58.1 C60.1 C61.1 J31.2 J33.2 J34.1 R7.2 U13.5 U14.6 U14.17 U14.36 U14.44
3.3V7: C64.1 C65.1 C67.1 C69.1 C70.1 J36.2 J38.2 J39.1 R8.2 U15.5 U16.6 U16.17 U16.36 U16.44
3.3V8: C73.1 C74.1 C76.1 C78.1 C79.1 J41.2 J43.2 J44.1 R9.2 U17.5 U18.6 U18.17 U18.36 U18.44
3.3V9: C82.1 C83.1 C85.1 C87.1 C88.1 J46.2 J48.2 J49.1 R10.2 U19.5 U20.6 U20.17 U20.36 U20.44
!RESET: J3.10 R2.1 U2.40
!RESET1: J9.10 R1.1 U4.40
!RESET2: J14.10 R3.1 U6.40
!RESET3: J19.10 R4.1 U8.40
!RESET4: J24.10 R5.1 U10.40
!RESET5: J29.10 R6.1 U12.40
!RESET6: J34.10 R7.1 U14.40
!RESET7: J39.10 R8.1 U16.40
!RESET8: J44.10 R9.1 U18.40
!RESET9: J49.10 R10.1 U20.40
A1: J4.4 U2.7
A2: J4.3 U2.8
A3: J10.4 U4.7
A4: J10.3 U4.8
A5: J15.4 U6.7
A6: J15.3 U6.8
A7: J20.4 U8.7
A8: J20.3 U8.8
A9: J25.4 U10.7
A10: J25.3 U10.8
A11: J30.4 U12.7
A12: J30.3 U12.8
A13: J35.4 U14.7
A14: J35.3 U14.8
A15: J40.4 U16.7
A16: J40.3 U16.8
A17: J45.4 U18.7
A18: J45.3 U18.8
A19: J50.4 U20.7
A20: J50.3 U20.8
D1: J10.2 U4.25
D2: J10.1 U4.27
D3: J15.2 U6.25
D4: J15.1 U6.27
D5: J20.2 U8.25
D6: J20.1 U8.27
D7: J25.2 U10.25
D8: J25.1 U10.27
D9: J30.2 U12.25
D10: J4.1 U2.27
D11: J4.2 U2.25
D12: J30.1 U12.27
D13: J35.2 U14.25
D14: J35.1 U14.27
D15: J40.2 U16.25
D16: J40.1 U16.27
D17: J45.2 U18.25
D18: J45.1 U18.27
D19: J50.2 U20.25
D20: J50.1 U20.27
GND: C1.2 C2.2 C5.2 C6.2 C7.2 C8.2 C9.2 C10.1 C11.2 D1.GND J1.1 J2.1 J3.3 J3.5 J3.9 J6.GND1 J6.SHLD1 J6.SHLD2 U1.2 U2.5 U2.18 U2.35 U2.42
GND1: C3.2 C4.2 C12.2 C13.2 C14.2 C15.2 C16.2 C17.1 C18.2 D3.GND J5.1 J7.GND1 J7.SHLD1 J7.SHLD2 J8.1 J9.3 J9.5 J9.9 U3.2 U4.5 U4.18 U4.35 U4.42
GND2: C19.2 C20.2 C21.2 C22.2 C23.2 C24.2 C25.2 C26.1 C27.2 D5.GND J11.1 J12.GND1 J12.SHLD1 J12.SHLD2 J13.1 J14.3 J14.5 J14.9 U5.2 U6.5 U6.18 U6.35 U6.42
GND3: C28.2 C29.2 C30.2 C31.2 C32.2 C33.2 C34.2 C35.1 C36.2 D7.GND J16.1 J17.GND1 J17.SHLD1 J17.SHLD2 J18.1 J19.3 J19.5 J19.9 U7.2 U8.5 U8.18 U8.35 U8.42
GND4: C37.2 C38.2 C39.2 C40.2 C41.2 C42.2 C43.2 C44.1 C45.2 D9.GND J21.1 J22.GND1 J22.SHLD1 J22.SHLD2 J23.1 J24.3 J24.5 J24.9 U9.2 U10.5 U10.18 U10.35 U10.42
GND5: C46.2 C47.2 C48.2 C49.2 C50.2 C51.2 C52.2 C53.1 C54.2 D11.GND J26.1 J27.GND1 J27.SHLD1 J27.SHLD2 J28.1 J29.3 J29.5 J29.9 U11.2 U12.5 U12.18 U12.35 U12.42
GND6: C55.2 C56.2 C57.2 C58.2 C59.2 C60.2 C61.2 C62.1 C63.2 D13.GND J31.1 J32.GND1 J32.SHLD1 J32.SHLD2 J33.1 J34.3 J34.5 J34.9 U13.2 U14.5 U14.18 U14.35 U14.42
GND7: C64.2 C65.2 C66.2 C67.2 C68.2 C69.2 C70.2 C71.1 C72.2 D15.GND J36.1 J37.GND1 J37.SHLD1 J37.SHLD2 J38.1 J39.3 J39.5 J39.9 U15.2 U16.5 U16.18 U16.35 U16.42
GND8: C73.2 C74.2 C75.2 C76.2 C77.2 C78.2 C79.2 C80.1 C81.2 D17.GND J41.1 J42.GND1 J42.SHLD1 J42.SHLD2 J43.1 J44.3 J44.5 J44.9 U17.2 U18.5 U18.18 U18.35 U18.42
GND9: C82.2 C83.2 C84.2 C85.2 C86.2 C87.2 C88.2 C89.1 C90.2 D19.GND J46.1 J47.GND1 J47.SHLD1 J47.SHLD2 J48.1 J49.3 J49.5 J49.9 U19.2 U20.5 U20.18 U20.35 U20.42
LED_IN: D1.DI U2.24
LED_IN1: D3.DI U4.24
LED_IN2: D5.DI U6.24
LED_IN3: D7.DI U8.24
LED_IN4: D9.DI U10.24
LED_IN5: D11.DI U12.24
LED_IN6: D13.DI U14.24
LED_IN7: D15.DI U16.24
LED_IN8: D17.DI U18.24
LED_IN9: D19.DI U20.24
N$1: F1.1 J6.VBUS1
N$2: D1.VCC D2.C
N$3: C10.2 U2.1 Y1.P$2
N$4: C11.1 U2.2 Y1.P$1
N$5: D3.VCC D4.C
N$6: F2.1 J7.VBUS1
N$7: C17.2 U4.1 Y2.P$2
N$8: C18.1 U4.2 Y2.P$1
N$9: D5.VCC D6.C
N$10: F3.1 J12.VBUS1
N$11: C26.2 U6.1 Y3.P$2
N$12: C27.1 U6.2 Y3.P$1
N$13: D7.VCC D8.C
N$14: F4.1 J17.VBUS1
N$15: C35.2 U8.1 Y4.P$2
N$16: C36.1 U8.2 Y4.P$1
N$17: D9.VCC D10.C
N$18: F5.1 J22.VBUS1
N$19: C44.2 U10.1 Y5.P$2
N$20: C45.1 U10.2 Y5.P$1
N$21: D11.VCC D12.C
N$22: F6.1 J27.VBUS1
N$23: C53.2 U12.1 Y6.P$2
N$24: C54.1 U12.2 Y6.P$1
N$25: D13.VCC D14.C
N$26: F7.1 J32.VBUS1
N$27: C62.2 U14.1 Y7.P$2
N$28: C63.1 U14.2 Y7.P$1
N$29: D15.VCC D16.C
N$30: F8.1 J37.VBUS1
N$31: C71.2 U16.1 Y8.P$2
N$32: C72.1 U16.2 Y8.P$1
N$33: D17.VCC D18.C
N$34: F9.1 J42.VBUS1
N$35: C80.2 U18.1 Y9.P$2
N$36: C81.1 U18.2 Y9.P$1
N$37: D19.VCC D20.C
N$38: F10.1 J47.VBUS1
N$39: C89.2 U20.1 Y10.P$2
N$40: C90.1 U20.2 Y10.P$1
SCL: J1.4 J2.4 U2.32
SCL1: J5.4 J8.4 U4.32
SCL2: J11.4 J13.4 U6.32
SCL3: J16.4 J18.4 U8.32
SCL4: J21.4 J23.4 U10.32
SCL5: J26.4 J28.4 U12.32
SCL6: J31.4 J33.4 U14.32
SCL7: J36.4 J38.4 U16.32
SCL8: J41.4 J43.4 U18.32
SCL9: J46.4 J48.4 U20.32
SDA: J1.3 J2.3 U2.31
SDA1: J5.3 J8.3 U4.31
SDA2: J11.3 J13.3 U6.31
SDA3: J16.3 J18.3 U8.31
SDA4: J21.3 J23.3 U10.31
SDA5: J26.3 J28.3 U12.31
SDA6: J31.3 J33.3 U14.31
SDA7: J36.3 J38.3 U16.31
SDA8: J41.3 J43.3 U18.31
SDA9: J46.3 J48.3 U20.31
SWCLK: J3.4 U2.45
SWCLK1: J9.4 U4.45
SWCLK2: J14.4 U6.45
SWCLK3: J19.4 U8.45
SWCLK4: J24.4 U10.45
SWCLK5: J29.4 U12.45
SWCLK6: J34.4 U14.45
SWCLK7: J39.4 U16.45
SWCLK8: J44.4 U18.45
SWCLK9: J49.4 U20.45
SWDIO: J3.2 U2.46
SWDIO1: J9.2 U4.46
SWDIO2: J14.2 U6.46
SWDIO3: J19.2 U8.46
SWDIO4: J24.2 U10.46
SWDIO5: J29.2 U12.46
SWDIO6: J34.2 U14.46
SWDIO7: J39.2 U16.46
SWDIO8: J44.2 U18.46
SWDIO9: J49.2 U20.46
USB_N: J6.D-1 U2.33
USB_N1: J7.D-1 U4.33
USB_N2: J12.D-1 U6.33
USB_N3: J17.D-1 U8.33
USB_N4: J22.D-1 U10.33
USB_N5: J27.D-1 U12.33
USB_N6: J32.D-1 U14.33
USB_N7: J37.D-1 U16.33
USB_N8: J42.D-1 U18.33
USB_N9: J47.D-1 U20.33
USB_P: J6.D+1 U2.34
USB_P1: J7.D+1 U4.34
USB_P2: J12.D+1 U6.34
USB_P3: J17.D+1 U8.34
USB_P4: J22.D+1 U10.34
USB_P5: J27.D+1 U12.34
USB_P6: J32.D+1 U14.34
USB_P7: J37.D+1 U16.34
USB_P8: J42.D+1 U18.34
USB_P9: J47.D+1 U20.34
VDDCORE1: C7.1 U2.43
VDDCORE2: C14.1 U4.43
VDDCORE3: C23.1 U6.43
VDDCORE4: C32.1 U8.43
VDDCORE5: C41.1 U10.43
VDDCORE6: C50.1 U12.43
VDDCORE7: C59.1 U14.43
VDDCORE8: C68.1 U16.43
VDDCORE9: C77.1 U18.43
VDDCORE10: C86.1 U20.43
VIN: C5.1 D2.A F1.2 U1.1 U1.3
VIN1: C12.1 D4.A F2.2 U3.1 U3.3
VIN2: C21.1 D6.A F3.2 U5.1 U5.3
VIN3: C30.1 D8.A F4.2 U7.1 U7.3
VIN4: C39.1 D10.A F5.2 U9.1 U9.3
VIN5: C48.1 D12.A F6.2 U11.1 U11.3
VIN6: C57.1 D14.A F7.2 U13.1 U13.3
VIN7: C66.1 D16.A F8.2 U15.1 U15.3
VIN8: C75.1 D18.A F9.2 U17.1 U17.3
VIN9: C84.1 D20.A F10.2 U19.1 U19.3